# EAGLE board untitled (EAGLE 9.4.2)
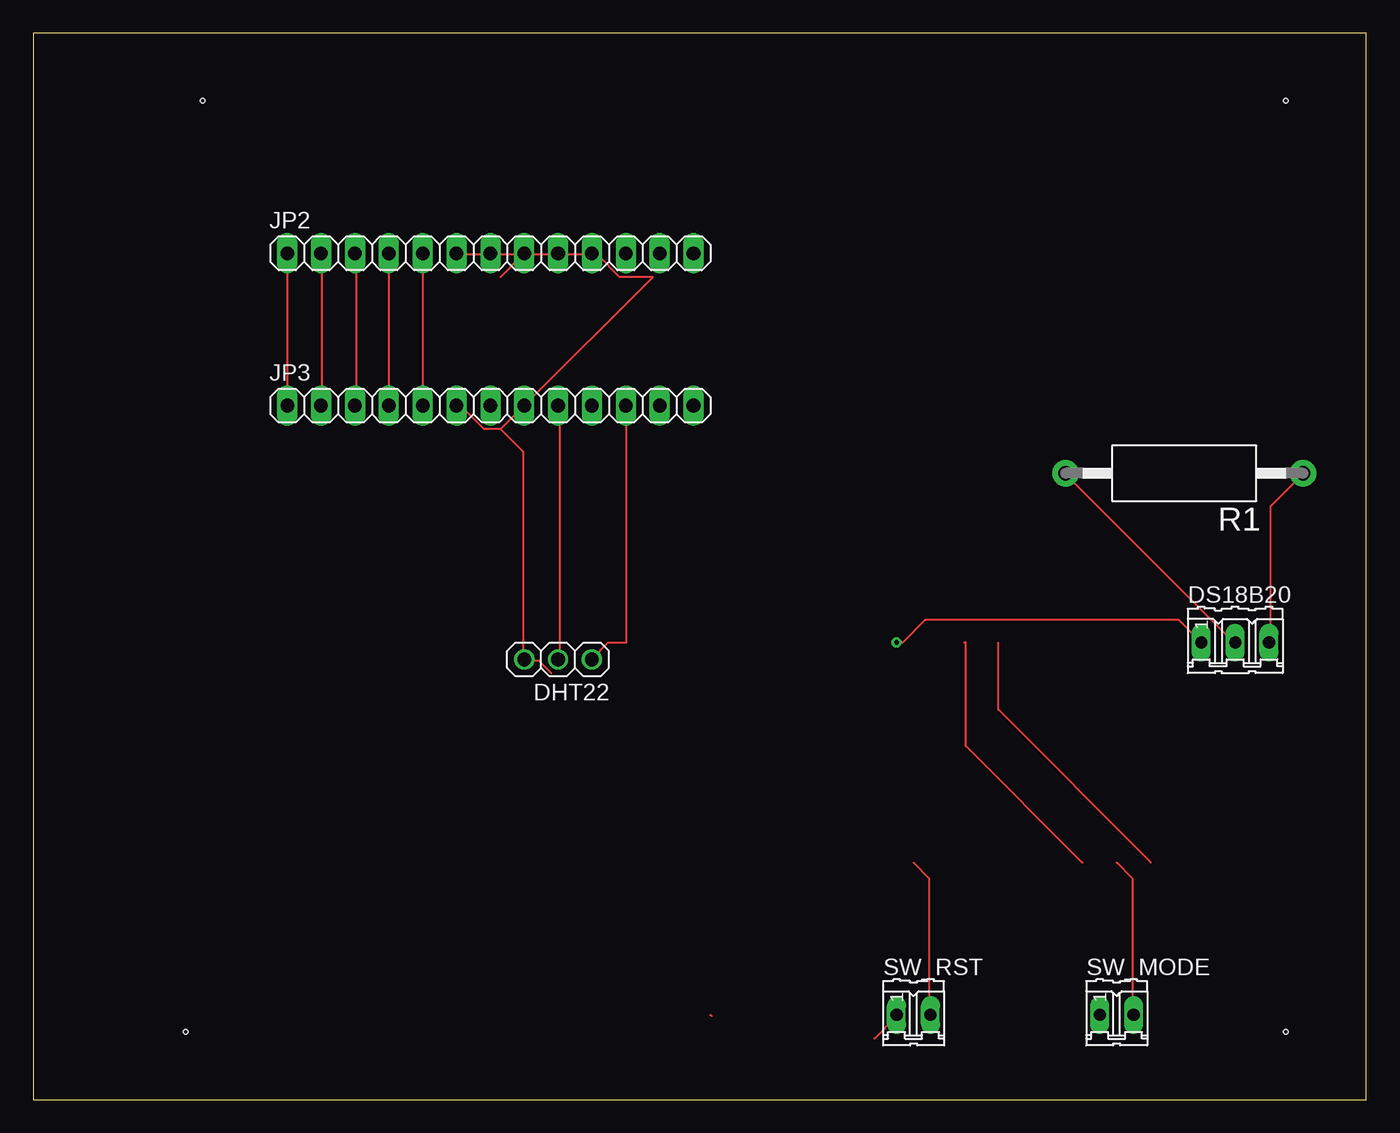
[diagram p0: board, top side]
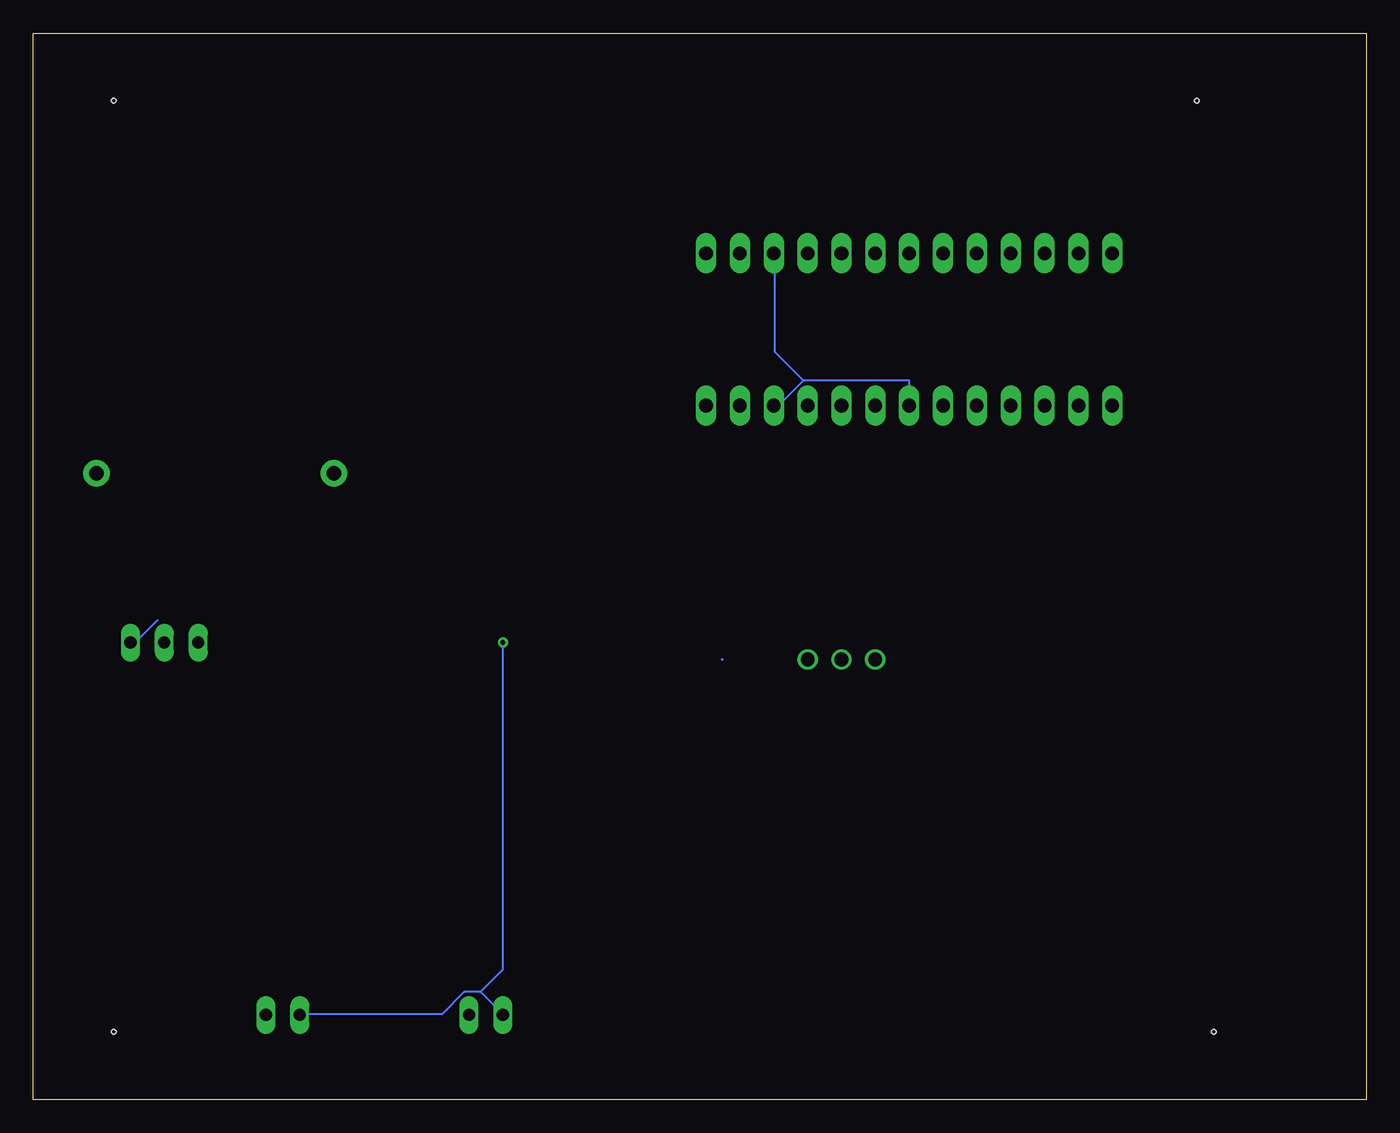
[diagram p1: board, bottom side, seen from below]

Size 100 x 80 mm. Coordinates in mm from the lower left corner, seen from the top.
Outline: 0,0 100,0 100,80 0,80 0,0
Copper layers (1*16): Top 0.035mm / dielectric 1.5mm / Bottom 0.035mm
Design rules "default": minimum track width 6mil, minimum drill 0.35mm, track to track 6mil, track to pad 6mil, pad to pad 6mil, via to via 6mil, smd to smd 6mil, copper to edge 40mil, drill to drill 6mil, minimum pad ring 10mil, minimum via ring 8mil, stop-mask expansion 4mil, vias tented up to drill 0mil, thermal gap 10mil
Holes 0.35 mm at 12.7,74.93 93.98,74.93 93.98,5.08 11.43,5.08

## Footprints (pad centres in the part's own frame; a part is rotated, then mirrored left to right if it is on the bottom)
1X03 = drill 1.016: 1 -2.54,0; 2 0,0; 3 2.54,0
03P = drill 0.914 long: 1 -2.54,0; 2 0,0; 3 2.54,0
1X13 = drill 1.016 long: 1 -15.24,0; 2 -12.7,0; 3 -10.16,0; 4 -7.62,0; 5 -5.08,0; 6 -2.54,0; 7 0,0; 8 2.54,0; 9 5.08,0; 10 7.62,0; 11 10.16,0; 12 12.7,0; 13 15.24,0
AC01 = drill 1.1 pad 2: 1 -8.9,0; 2 8.9,0
02P = drill 0.914 long: 1 -1.27,0; 2 1.27,0

## Placement (x,y rotation side)
DHT22  [1X03]  39.37,33.02 180 top
DS18B20  [03P]  90.17,34.29 0 top
JP2  [1X13]  34.29,63.5 0 top
JP3  [1X13]  34.29,52.07 0 top
R1  4.7K  [AC01]  86.36,46.99 180 top
SW_MODE  [02P]  81.28,6.35 0 top
SW_RST  [02P]  66.04,6.35 0 top

## Library data of the parts
DHT22 JP2 JP3 = adafruit
DS18B20 SW_MODE SW_RST = con-amp-quick; OC_FARNELL: unknown; OC_NEWARK: unknown
R1 = resistor-power; OC_FARNELL: unknown; OC_NEWARK: unknown

## Nets
1WIRE: DS18B20.2 R1.2
3.3V: DHT22.1 JP2.11 JP3.7 JP3.11
DATA_T: DHT22.2 JP3.9
GND: DS18B20.1 SW_MODE.1 SW_RST.1
MODE: SW_MODE.2
N$1: JP2.1 JP3.1
N$4: JP2.2 JP3.2
N$6: JP2.3 JP3.3
N$7: JP2.4 JP3.4
N$15: JP2.12
PGM: JP2.5 JP3.5
RST: SW_RST.2
S$2: DS18B20.3 R1.1
S$4: JP3.12
S$5: JP2.9
S$6: DHT22.3 JP2.6 JP2.8 JP3.6 JP3.8

## Tracks (layer width: path | path; a pad name or v marks a point on that pad's centre or on a via)
1WIRE
  Top 0.152: DS18B20.2 90.07,34.29 77.42,46.94 R1.2
3.3V
  Top 0.152: DHT22.1 41.91,33.07 43.13,34.29 44.5,34.29 44.5,51.97 JP3.11
  Bottom 0.152: JP3.7 34.29,53.95 42.22,53.95 | 42.22,53.95 44.04,52.12 44.35,52.12 JP3.11 | 42.22,53.95 44.35,56.08 44.35,63.4 JP2.11
AOUT1
  Top 0.152: 72.39,34.29 72.39,29.26 83.82,17.83 83.82,17.78
AOUT2
  Top 0.152: 69.85,34.29 69.95,34.29 69.95,26.52 78.64,17.83 78.74,17.78
DATA_T
  Top 0.152: DHT22.2 39.47,33.07 39.47,51.97 JP3.9 39.47,52.12
GND  (via drill 0.35)
  Top 0.152: v64.77,34.29 65.23,34.29 66.9,35.97 85.95,35.97 DS18B20.1 | 63.09,4.57 64.77,6.25 SW_RST.1
  Bottom 0.152: 66.45,8.08 67.67,8.08 69.34,6.4 80.01,6.4 SW_MODE.1 | 66.45,8.08 64.77,6.4 SW_RST.1 | v64.77,34.29 64.77,9.75 66.45,8.08
MODE
  Top 0.152: 81.28,17.78 82.45,16.61 82.45,6.4 SW_MODE.2
N$1
  Top 0.152: JP2.1 JP3.1
N$4
  Top 0.152: JP3.2 21.64,52.12 21.64,63.4 JP2.2
N$6
  Top 0.152: JP3.3 24.23,52.12 24.23,63.4 JP2.3
N$7
  Top 0.152: JP2.4 JP3.4
N$15
  Top 0.152: 47.09,63.4 JP2.12
PGM
  Top 0.152: JP2.5 29.26,63.4 29.26,52.12 JP3.5
  Bottom 0.152: 29.26,51.97 JP3.5
RST
  Top 0.152: 66.04,17.78 67.21,16.61 67.21,6.4 SW_RST.2
S$1
  Top 0.152: 50.9,6.25 50.8,6.35
S$2
  Top 0.152: R1.1 95.25,46.94 92.81,44.5 92.81,34.29 DS18B20.3
  Bottom 0.152: DS18B20.3 92.35,34.29 90.68,35.97
S$3
  Bottom 0.152: 48.36,33.02 48.26,33.02
S$4
  Top 0.152: 47.09,52.12 JP3.12
S$5
  Top 0.152: 39.47,63.4 JP2.9
S$6
  Top 0.152: JP2.6 31.85,63.4 42.32,63.4 43.99,61.72 46.48,61.72 JP3.8 35.05,50.29 | JP2.8 35.05,61.72 | JP3.6 31.85,51.97 32.16,51.97 33.83,50.29 35.05,50.29 | 35.05,50.29 36.73,48.62 36.73,33.07 DHT22.3 36.88,32.92 37.95,32.92 38.86,32